# Altium PCB Led Strip 2 colors Long.PcbDoc
Units mm, origin at the board's own origin, x right, y up, seen from the top; angles counter-clockwise.
Board outline 300 x 30 mm, 4 copper layers (Top Layer, Internal Plane 1, Internal Plane 2, Bottom Layer), stack 0.462 mm thick; 34 components, 20 nets, 85 pads, 18 vias.
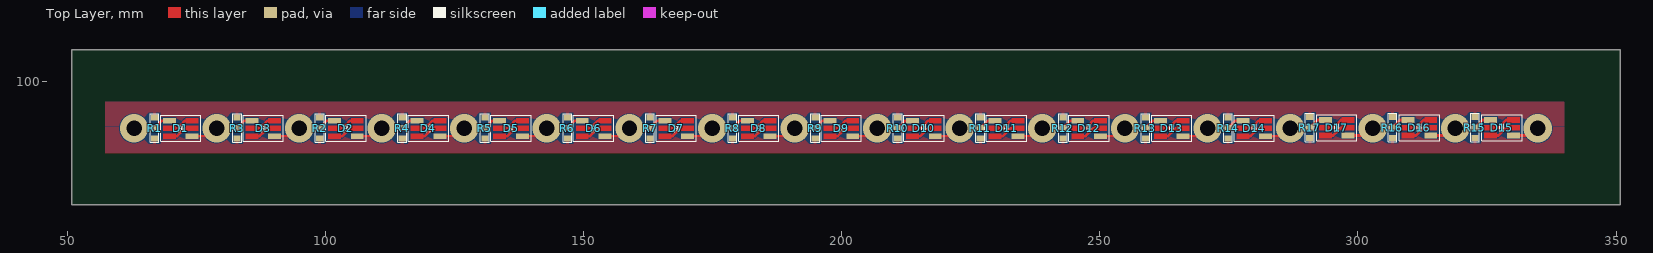
[diagram p0: Top Layer view]
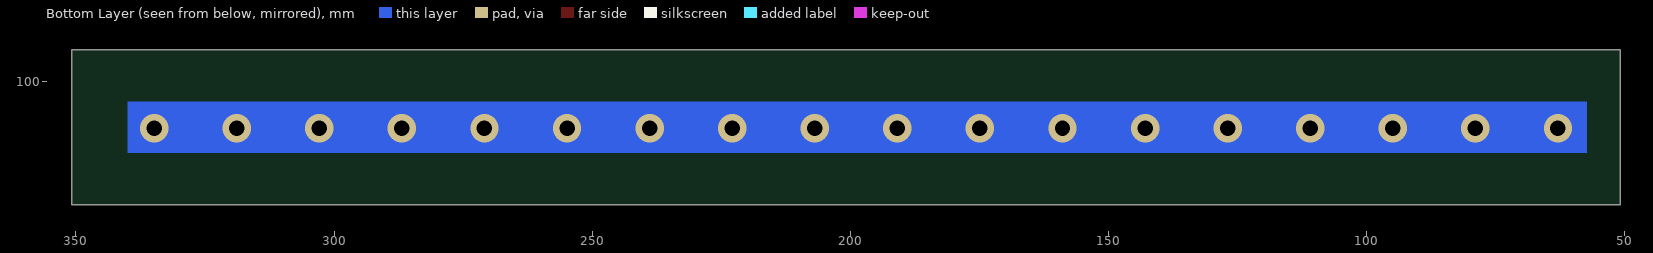
[diagram p1: Bottom Layer view, seen from below]
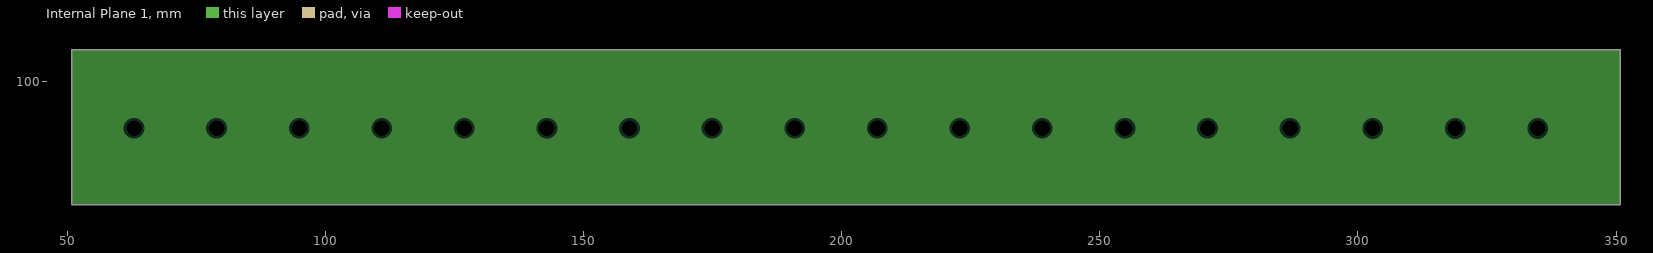
[diagram p2: Internal Plane 1, clearances drawn from the general rule]
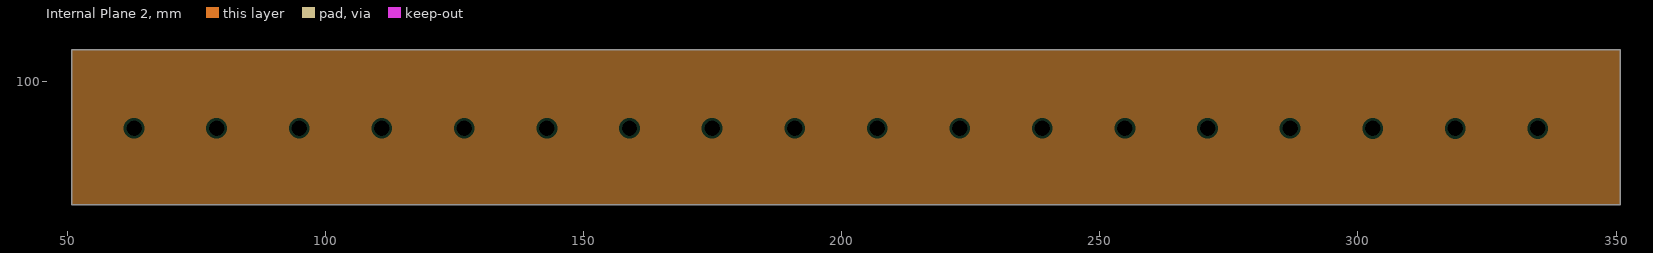
[diagram p3: Internal Plane 2, clearances drawn from the general rule]

## Layer stack, top to bottom
Top Solder: solder mask 0.0102, Solder Resist, Dk 3.5
Top Layer: signal copper 0.0356
Internal Plane 1: plane copper 0.0356
Internal Plane 2: plane copper 0.0356
Dielectric 1: dielectric 0.32, FR-4, Dk 4.8
Bottom Layer: signal copper 0.0356
Bottom Solder: solder mask 0.0102, Solder Resist, Dk 3.5

## Board outline
50.8,76.2 350.8,76.2 350.8,106.2 50.8,106.2

## Design rules (kind name [scope] priority, off if disabled: settings)
Clearance [All] p1: gap=0.2
HoleSize [All] p1: absolutevalues=TRUE maxlimit=10 minlimit=0.025 maxpercent=80.000 minpercent=20.000
PlaneClearance [All] p1: clearance=0.508
PlaneConnect [All] p1: planeconnectstyle=Relief reliefexpansion=0.508 reliefentries=4 reliefconductorwidth=0.254 reliefairgap=0.254
PolygonConnect [All] p1: connectstyle=Relief reliefconductorwidth=0.5 reliefentries=4 polygonreliefangle="90 Angle" airgapwidth=0.5
RoutingVias [All] p1: holewidth=0.3 width=2 viastyle="Through Hole" minholewidth=0.711 minwidth=1.27 maxholewidth=10 maxwidth=10
SolderMaskExpansion [All] p1: expansion=0.05
Width [All] p1: maxlimit=3 minlimit=0.2 preferedwidth=0.5
26 further rules are at their usual default settings.

## Components (designator, comment, footprint, x,y, rotation, side; value= is the part's Value field where it differs from the comment)
D1 "Cold White" "LED SMD 5050 White compact R" 69.7,92.483 r0 top
D2 "Cold White" "LED SMD 5050 White compact R" 101.7,92.483 r0 top
D3 "Cold White" "LED SMD 5050 White compact R" 85.7,92.483 r0 top
D4 "Cold White" "LED SMD 5050 White compact R" 117.7,92.483 r0 top
D5 "Cold White" "LED SMD 5050 White compact R" 133.7,92.483 r0 top
D6 "Cold White" "LED SMD 5050 White compact R" 149.7,92.483 r0 top
D7 "Cold White" "LED SMD 5050 White compact R" 165.7,92.483 r0 top
D8 "Cold White" "LED SMD 5050 White compact R" 181.7,92.483 r0 top
D9 "Cold White" "LED SMD 5050 White compact R" 197.7,92.483 r0 top
D10 "Cold White" "LED SMD 5050 White compact R" 213.7,92.483 r0 top
D11 "Cold White" "LED SMD 5050 White compact R" 229.7,92.483 r0 top
D12 "Cold White" "LED SMD 5050 White compact R" 245.7,92.483 r0 top
D13 "Cold White" "LED SMD 5050 White compact R" 261.7,92.483 r0 top
D14 "Cold White" "LED SMD 5050 White compact R" 277.7,92.483 r0 top
D15 "Cold White" "LED SMD 5050 White compact R" 325.7,92.6 r0 top
D16 "Cold White" "LED SMD 5050 White compact R" 309.7,92.6 r0 top
D17 "Cold White" "LED SMD 5050 White compact R" 293.7,92.6 r0 top
R1 "1: Om; 2: Om" "SMD 0805 (2012) Double" 66.85,88.983 r90 top
R2 "1: Om; 2: Om" "SMD 0805 (2012) Double" 98.85,88.983 r90 top
R3 "1: Om; 2: Om" "SMD 0805 (2012) Double" 82.85,88.983 r90 top
R4 "1: Om; 2: Om" "SMD 0805 (2012) Double" 114.85,88.983 r90 top
R5 "1: Om; 2: Om" "SMD 0805 (2012) Double" 130.85,88.983 r90 top
R6 "1: Om; 2: Om" "SMD 0805 (2012) Double" 146.85,88.983 r90 top
R7 "1: Om; 2: Om" "SMD 0805 (2012) Double" 162.85,88.983 r90 top
R8 "1: Om; 2: Om" "SMD 0805 (2012) Double" 178.85,88.983 r90 top
R9 "1: Om; 2: Om" "SMD 0805 (2012) Double" 194.85,88.983 r90 top
R10 "1: Om; 2: Om" "SMD 0805 (2012) Double" 210.85,88.983 r90 top
R11 "1: Om; 2: Om" "SMD 0805 (2012) Double" 226.85,88.983 r90 top
R12 "1: Om; 2: Om" "SMD 0805 (2012) Double" 242.85,88.983 r90 top
R13 "1: Om; 2: Om" "SMD 0805 (2012) Double" 258.85,88.983 r90 top
R14 "1: Om; 2: Om" "SMD 0805 (2012) Double" 274.85,88.983 r90 top
R15 "1: Om; 2: Om" "SMD 0805 (2012) Double" 322.7,89.1 r90 top
R16 "1: Om; 2: Om" "SMD 0805 (2012) Double" 306.7,89.1 r90 top
R17 "1: Om; 2: Om" "SMD 0805 (2012) Double" 290.7,89.1 r90 top

## Footprints (in the part's own frame and the unit in brackets; to place one, negate y for a bottom-side part, rotate by r counter-clockwise, add the part's x,y. Pads: shape width x height; smd on the part's side, far side on the other; paste and mask are expansions set on the pad)
"LED SMD 5050 White compact R" [mm]
  rect 2.5x1.1 smd: A(0,0) K(4.4,-3)
  Top Layer region: -1.25,-3.55 1.25,-3.55 1.25,-2.45 -1.25,-2.45
  Top Layer region: -1.25,-2.05 1.25,-2.05 1.25,-0.95 -1.25,-0.95
  Top Layer region: 3.15,-2.05 5.65,-2.05 5.65,-0.95 3.15,-0.95
  Top Layer region: 3.15,-0.55 5.65,-0.55 5.65,0.55 3.15,0.55
  Top Layer lines w0.5: 0,-3 1.5,-3 2.3,-2.2 3,-1.5 4.4,-1.5 ; 0,-1.5 1.5,-1.5 2.2,-0.8 3,0 4.4,0
  silkscreen extent -1.7,-4 6.1,1, body extent -0.45,-4 4.85,1, height 1.6
"SMD 0805 (2012) Double" [mil]
  rect 45x55 smd: 1(0.35,0.98) 2(160.35,0.98) 3(80.35,0.98)
  silkscreen extent -29,-32 189,34, body extent 1,-24 159,26, height 18

## Part data
D1 D2 D3 D4 D5 D6 D7 D8 D9 D10 D11 D12 D13 D14 D15 D16 D17: library part "Led SMD White Cold", "?3v ?20mA"
R1 R2 R3 R4 R5 R6 R7 R8 R9 R10 R11 R12 R13 R14 R15 R16 R17: library part "Res SMD (Select one way)", "Choice from two resistors"

## Via types
v1: diameter 5.5, hole 3, Top Layer to Bottom Layer, 18 vias

## Nets (pads, with @x,y where several pads share a name; then routed paths per layer and width w, separated by ;. In a path a pad name is that pad's centre, name@x,y a point inside that pad or via, vN(x,y) a via of type N, cw(c..) or ccw(c..) an arc to the next point about the centre after c; other vN are vias at no path point)
GND: D1.K D2.K D3.K D4.K D5.K D6.K D7.K D8.K D9.K D10.K D11.K D12.K D13.K D14.K D15.K D16.K D17.K | length 55.6
  Top Layer w0.5: D1.K v1@77.35,89.483 ; D3.K v1@93.35,89.483 ; D2.K v1@109.35,89.483 ; D4.K v1@125.35,89.483 ; D5.K v1@141.35,89.483 ; D6.K v1@157.35,89.483 ; D7.K v1@173.35,89.483 ; D8.K v1@189.35,89.483 ; D9.K v1@205.35,89.483 ; D10.K v1@221.35,89.483 ; D11.K v1@237.35,89.483 ; D12.K v1@253.35,89.483 ; D13.K v1@269.35,89.483 ; D14.K v1@285.35,89.483 ; D17.K v1@301.475,89.6 ; D16.K v1@317.475,89.6 ; D15.K v1@333.475,89.6
  other v1: 62.85,90.983 78.85,90.983 94.85,90.983 110.85,90.983 126.85,90.983 142.85,90.983 158.85,90.983 174.85,90.983 190.85,90.983 206.85,90.983 222.85,90.983 238.85,90.983 254.85,90.983 270.85,90.983 286.85,90.983 302.85,90.975 318.85,90.975 334.85,90.975
NetD1_A: D1.A R1.3 | length 3.5
  Top Layer w0.5: R1.3 68.284,92.483 D1.A
NetD2_A: D2.A R2.3 | length 3.5
  Top Layer w0.5: R2.3 100.284,92.483 D2.A
NetD3_A: D3.A R3.3 | length 3.5
  Top Layer w0.5: R3.3 84.284,92.483 D3.A
NetD4_A: D4.A R4.3 | length 3.5
  Top Layer w0.5: R4.3 116.284,92.483 D4.A
NetD5_A: D5.A R5.3 | length 3.5
  Top Layer w0.5: R5.3 132.284,92.483 D5.A
NetD6_A: D6.A R6.3 | length 3.5
  Top Layer w0.5: R6.3 148.284,92.483 D6.A
NetD7_A: D7.A R7.3 | length 3.5
  Top Layer w0.5: R7.3 164.284,92.483 D7.A
NetD8_A: D8.A R8.3 | length 3.5
  Top Layer w0.5: R8.3 180.284,92.483 D8.A
NetD9_A: D9.A R9.3 | length 3.5
  Top Layer w0.5: R9.3 196.284,92.483 D9.A
NetD10_A: D10.A R10.3 | length 3.5
  Top Layer w0.5: R10.3 212.284,92.483 D10.A
NetD11_A: D11.A R11.3 | length 3.5
  Top Layer w0.5: R11.3 228.284,92.483 D11.A
NetD12_A: D12.A R12.3 | length 3.5
  Top Layer w0.5: R12.3 244.284,92.483 D12.A
NetD13_A: D13.A R13.3 | length 3.5
  Top Layer w0.5: R13.3 260.284,92.483 D13.A
NetD14_A: D14.A R14.3 | length 3.5
  Top Layer w0.5: R14.3 276.284,92.483 D14.A
NetD15_A: D15.A R15.3 | length 3.6
  Top Layer w0.5: R15.3 324.134,92.6 D15.A
NetD16_A: D16.A R16.3 | length 3.6
  Top Layer w0.5: R16.3 308.134,92.6 D16.A
NetD17_A: D17.A R17.3 | length 3.6
  Top Layer w0.5: R17.3 292.134,92.6 D17.A
VCC1: R1.2 R2.2 R3.2 R4.2 R5.2 R6.2 R7.2 R8.2 R9.2 R10.2 R11.2 R12.2 R13.2 R14.2 R15.2 R16.2 R17.2
VCC2: R1.1 R2.1 R3.1 R4.1 R5.1 R6.1 R7.1 R8.1 R9.1 R10.1 R11.1 R12.1 R13.1 R14.1 R15.1 R16.1 R17.1

## Polygon pours and split planes (outlines as drawn)
VCC2 on Top Layer "Top Layer-No Net" (solid, pour order 12): 339.975,86.183 339.975,91.183 57.25,91.183 57.25,86.183
VCC1 on Top Layer "Top Layer-No Net" (solid, pour order 12): 339.975,91.183 339.975,96.183 57.25,96.183 57.25,91.183

## Other copper
Bottom Layer:
  rectangle net GND: 57.25,86.183 339.975,96.183

## Silkscreen, mask and mechanical layers (free items; w line width, h text height)
Drill Drawing:
  text ".LEGEND" at 57.404,59.69 h1.52
  text "Drill Drawing." at 55.118,52.324 h1.52

## Dimensions
50.8,76.2 to 50.8,106.2 on Mechanical 2
50.8,76.2 to 350.8,76.2 on Mechanical 2